# Altium PCB Shoot_Sensor.PcbDoc
Units mm, origin at the board's own origin, x right, y up, seen from the top; angles counter-clockwise.
Board outline 25.52 x 7.99 mm, 2 copper layers (Top Layer, Bottom Layer); 2 components, 3 nets, 7 pads, 0 vias.
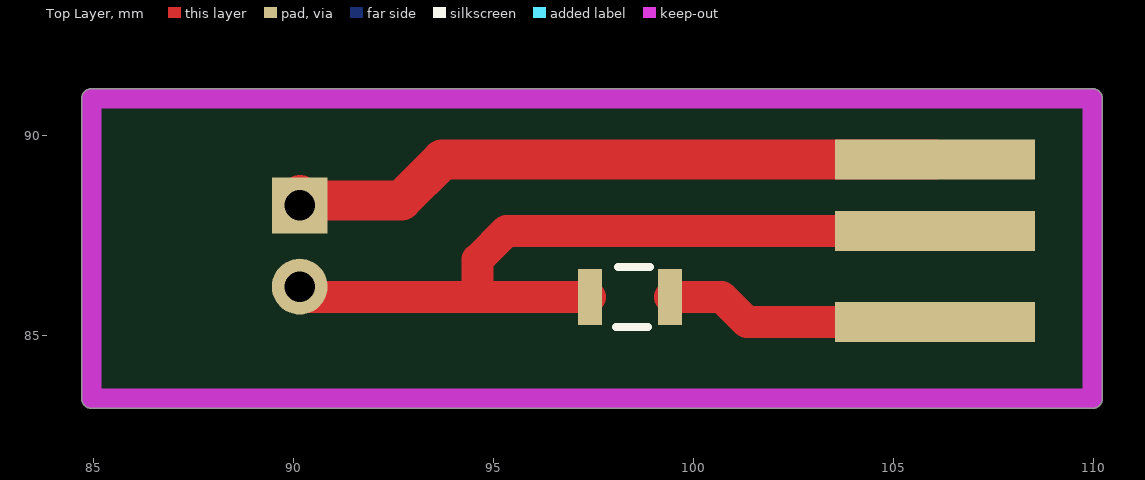
[diagram p0: Top Layer view]
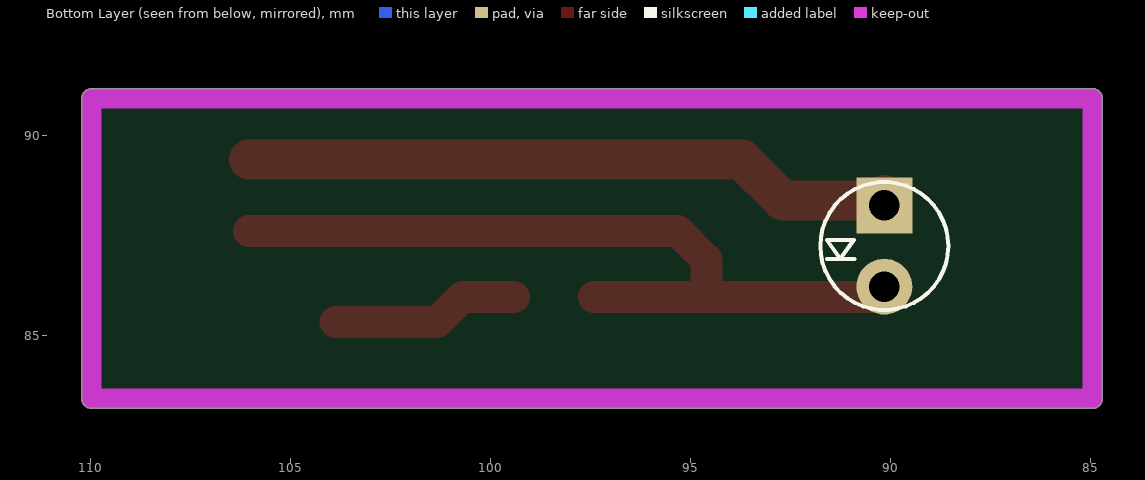
[diagram p1: Bottom Layer view, seen from below]

## Layer stack, top to bottom
Top Solder: solder mask 0.0102, Solder Resist, Dk 3.5
Top Layer: signal copper 0.0356
Dielectric 1: dielectric 0.32, FR-4, Dk 4.8
Bottom Layer: signal copper 0.0356
Bottom Solder: solder mask 0.0102, Solder Resist, Dk 3.5

## Board outline
84.713,83.439 ccw(c84.963,83.439) 84.963,83.189 109.982,83.189 ccw(c109.982,83.439) 110.232,83.439 110.232,90.932 ccw(c109.982,90.932) 109.982,91.182 84.963,91.182 ccw(c84.963,90.932) 84.713,90.932

## Design rules (kind name [scope] priority, off if disabled: settings)
Clearance [All] p1: gap=0.254 ignorepadtopadclearanceinfootprint=FALSE except(0: Arc-Hole Track-Hole SMDPad-Hole THPad-Hole Via-Hole Fill-Hole Poly-Hole Region-Hole Text-Hole)
PolygonConnect [All] p1: connectstyle=Relief reliefconductorwidth=0.254 reliefentries=4 polygonreliefangle="90 Angle" airgapwidth=0.254
RoutingVias [All] p1: holewidth=0.711 width=1.27 viastyle="Through Hole" minholewidth=0.711 minwidth=1.27 maxholewidth=0.711 maxwidth=1.27
SolderMaskExpansion [All] p1: expansion=0.102 istentingtop=FALSE
Width [All] p1: maxlimit=10 minlimit=0.1 preferedwidth=0.254
30 further rules are at their usual default settings.

## Components (designator, comment, footprint, x,y, rotation, side; value= is the part's Value field where it differs from the comment)
? "Comment" LED3mm_GRN 90.165,87.249 r270 bottom
? "Comment" MY_RES_SMD_0805 98.425,85.979 r180 top

## Footprints (in the part's own frame and the unit in brackets; to place one, negate y for a bottom-side part, rotate by r counter-clockwise, add the part's x,y. Pads: shape width x height; smd on the part's side, far side on the other; paste and mask are expansions set on the pad)
LED3mm_GRN [mil]
  rect 55x55 hole 30: 1(-40,0)
  round 55 hole 30: 2(40,0)
  silkscreen extent -63,-63 63,63, body extent -69,-69 69,69, height 154
MY_RES_SMD_0805 [mm]
  rect 0.6x1.4 smd: 1(-1,0) 2(1,0)
  silkscreen extent -0.5,-0.75 0.35,0.75, body extent -1,-0.62 1,0.63, height 0.78

## Free pads (board coordinates)
  rect 5x1 smd: 3(106.045,85.344) 3(106.045,87.63) 3(106.045,89.408)

## Nets (pads, with @x,y where several pads share a name; then routed paths per layer and width w, separated by ;. In a path a pad name is that pad's centre, name@x,y a point inside that pad or via, vN(x,y) a via of type N, cw(c..) or ccw(c..) an arc to the next point about the centre after c; other vN are vias at no path point)
data: ?.2 pad.3@106.045,87.63 | length 19.9
  Top Layer w0.8: ?.2@90.17,85.979 94.615,85.979 ; ?.2@97.425,85.979 94.615,85.979 ; pad.3@106.045,87.63 105.791,87.63 95.338,87.63 94.615,86.907 94.615,85.979
gnd: ?.1@90.165,88.265 pad.3@106.045,89.408 | length 16.3
  Top Layer w1: ?.1@90.17,88.519 90.297,88.392 92.71,88.392 93.726,89.408 pad.3@106.045,89.408
vcc: ?.1@99.425,85.979 pad.3@106.045,85.344 | length 4.7
  Top Layer w0.8: ?.1@99.425,85.979 100.711,85.979 101.346,85.344 pad.3@103.886,85.344

## Keep-outs
Keep-Out Layer:
  lines w0.5: 84.963,83.439 109.982,83.439 109.982,90.932 84.963,90.932 84.963,83.439